# Altium PCB BatteryNode.PcbDoc
Units mm, origin at the board's own origin, x right, y up, seen from the top; angles counter-clockwise.
Board outline 31.5 x 42.42 mm, 2 copper layers (Top Layer, Bottom Layer); 13 components, 16 nets, 61 pads, 0 vias.
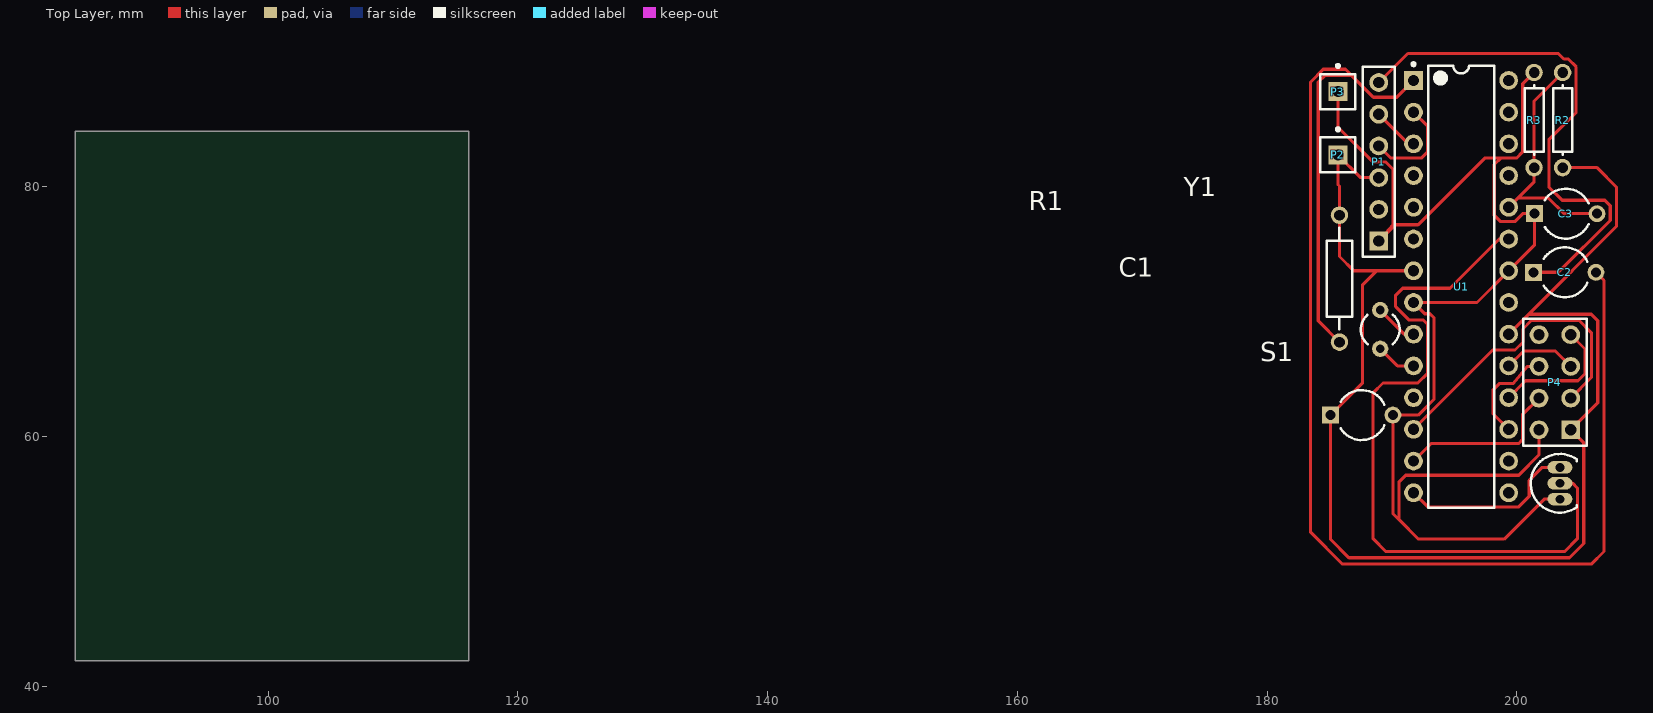
[diagram p0: Top Layer view]
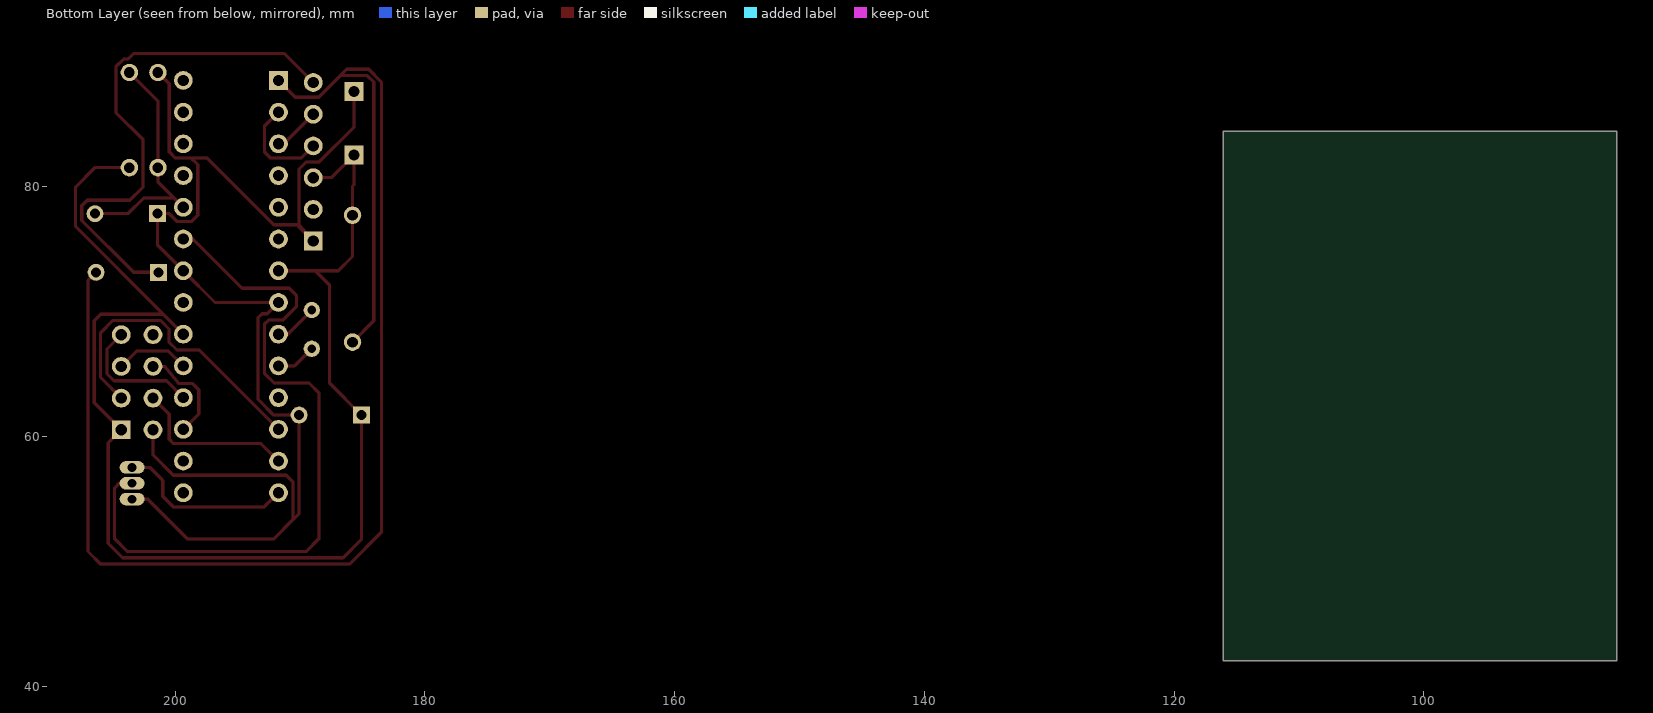
[diagram p1: Bottom Layer view, seen from below]

## Layer stack, top to bottom
Top Layer: signal copper 0.0356
Dielectric: dielectric 0.32, FR-4, Dk 4.8
Bottom Layer: signal copper 0.0356

## Board outline
84.582,84.455 116.078,84.455 116.078,42.418 116.078,42.037 84.582,42.037

## Design rules (kind name [scope] priority, off if disabled: settings)
Clearance [All] p1: gap=0.254
PolygonConnect [All] p1: connectstyle=Relief reliefconductorwidth=0.254 reliefentries=4 polygonreliefangle="90 Angle"
RoomDefinition BatteryNode [InComponentClass('BatteryNode')] p1: confinementstyle=ConfineIn formatcopy=TRUE lockcomponents=FALSE outline 179.284,49.784 209.677,49.784 209.677,96.139 179.284,96.139
RoutingLayers [All] p1: top layer_v5=TRUE bottom layer_v5=FALSE
RoutingVias [All] p1: holewidth=0.711 width=1.27 viastyle="Through Hole" minholewidth=0.711 minwidth=1.27 maxholewidth=0.711 maxwidth=1.27
SilkscreenOverComponentPads [All] p1: minsilkscreentomaskgap=0.254
SolderMaskExpansion [All] p1: expansion=0.102
Width [All] p1: maxlimit=0.254 minlimit=0.254 preferedwidth=0.254
26 further rules are at their usual default settings.

## Components (designator, comment, footprint, x,y, rotation, side; value= is the part's Value field where it differs from the comment)
C1 "Cap2" CAPR5-4X5 187.579,61.722 r0 top
C2 "Cap2" CAPR5-4X5 203.835,73.152 r0 top
C3 "Cap2" CAPR5-4X5 203.922,77.851 r0 top
P1 "FTDI" HDR1X6 188.949,75.652 r90 top
P2 "+" PIN1 185.674,82.55 r0 top
P3 "-" PIN1 185.674,87.63 r0 top
P4 "nRF24L01Connector" HDR2X4 204.316,60.539 r90 top
R1 "Res2" AXIAL-0.4 185.801,72.644 r90 top
R2 "Res1" AXIAL-0.3 203.668,85.344 r90 top
R3 "Res1" AXIAL-0.3 201.382,85.344 r90 top
S1 "LM35" TO-92 203.454,56.261 r0 top
U1 "ATmega328-PU" 28P3 195.54,72.009 r0 top
Y1 "XTAL" R38 189.063,68.58 r0 top

## Footprints (in the part's own frame and the unit in brackets; to place one, negate y for a bottom-side part, rotate by r counter-clockwise, add the part's x,y. Pads: shape width x height; smd on the part's side, far side on the other; paste and mask are expansions set on the pad)
28P3 [mm] "DIP, 28-Leads, Row Spacing 7.62mm, Pitch 2.54mm, Body 34.67x7.3mm"
  rect 1.5x1.5 hole 0.9: 1(-3.81,16.51)
  round 1.5 hole 0.9: 2(-3.81,13.97) 3(-3.81,11.43) 4(-3.81,8.89) 5(-3.81,6.35) 6(-3.81,3.81) 7(-3.81,1.27) 8(-3.81,-1.27) 9(-3.81,-3.81) 10(-3.81,-6.35) 11(-3.81,-8.89) 12(-3.81,-11.43) 13(-3.81,-13.97) 14(-3.81,-16.51) 15(3.81,-16.51) 16(3.81,-13.97) 17(3.81,-11.43) 18(3.81,-8.89) 19(3.81,-6.35) 20(3.81,-3.81) 21(3.81,-1.27) 22(3.81,1.27) 23(3.81,3.81) 24(3.81,6.35) 25(3.81,8.89) 26(3.81,11.43) 27(3.81,13.97) 28(3.81,16.51)
  silkscreen extent -3.93,-17.7 2.65,17.93, body extent -3.6,-17.65 3.6,17.65, height 4.58
AXIAL-0.3 [mm] "Axial Device, Thru-Hole; 2 Leads; 0.3 in Pin Spacing"
  round 1.4 hole 0.85: 1(-3.81,0) 2(3.81,0)
  silkscreen extent -2.77,-0.76 2.77,0.76
AXIAL-0.4 [mm] "Axial Device, Thru-Hole; 2 Leads; 0.4 in Pin Spacing"
  round 1.4 hole 0.85: 1(-5.08,0) 2(5.08,0)
  silkscreen extent -4.06,-1.02 4.06,1.02
CAPR5-4X5 [mm] "Capacitor; 2 Leads"
  rect 1.35x1.35 hole 0.8: 1(-2.5,0)
  round 1.35 hole 0.8: 2(2.5,0)
  silkscreen extent -1.69,-2 1.82,2
HDR1X6 [mm] "Connector; Header; 6 Position"
  rect 1.5x1.5 hole 0.9: 1(0,0)
  round 1.5 hole 0.9: 2(2.54,0) 3(5.08,0) 4(7.62,0) 5(10.16,0) 6(12.7,0)
  silkscreen extent -1.27,-1.27 13.97,1.27
HDR2X4 [mm] "Connector; Header; 4x2 Position"
  rect 1.5x1.5 hole 0.9: 1(0,0)
  round 1.5 hole 0.9: 2(0,2.54) 3(2.54,0) 4(2.54,2.54) 5(5.08,0) 6(5.08,2.54) 7(7.62,0) 8(7.62,2.54)
  silkscreen extent -1.27,-1.27 8.89,3.81
PIN1 [mm] "Connector; Plug"
  rect 1.5x1.5 hole 0.9: 1(0,0)
  silkscreen extent -1.4,-1.4 1.4,2.17
R38 [mm] "Crystal, Thru-Hole; 2 Leads; Body 3.1 x 8.2 mm (Dia.xH)"
  round 1.3 hole 0.7: 1(0,1.55) 2(0,-1.55)
  silkscreen extent -1.55,-1.19 1.55,1.17
TO-92 [mm] "TO, Flat Index; 3 In-Line, Axial Leads; Body Dia. 4.6mm; Leads 0.41 x 0.39 mm (max)"
  oval 2x1 hole 0.7: 1(0,1.27) 2(0,0) 3(0,-1.27)
  silkscreen extent -2.34,-2.34 1.35,2.34

## Part data
C1 C2 C3: "Capacitor"
P1: library part "Header 6", "Header, 6-Pin"
P2 P3: library part Plug, "Plug"
R1 R2 R3: "Resistor"
U1: "8-bit AVR Microcontroller, 32KB Flash, 1KB EEPROM, 2KB SRAM, 28-pin PDIP, Industrial Grade (-40°C to 85°C)"
Y1: "Crystal Oscillator"

## Nets (pads, with @x,y where several pads share a name; then routed paths per layer and width w, separated by ;. In a path a pad name is that pad's centre, name@x,y a point inside that pad or via, vN(x,y) a via of type N, cw(c..) or ccw(c..) an arc to the next point about the centre after c; other vN are vias at no path point)
GND: C1.2 C3.1 P1.1 P3.1 P4.2 R3.2 S1.3 U1.8 U1.22 | length 111.8
  Top Layer w0.254: P3.1 185.674,84.785 188.468,81.991 189.484,81.991 190.091,81.384 190.091,76.962 ; R3.2 200.482,88.254 200.482,82.804 199.974,82.296 198.704,82.296 ; P4.2 201.776,58.532 200.152,56.908 191.096,56.908 190.576,56.388 190.576,53.34 ; S1.3 202.184,54.991 198.981,51.788 192.128,51.788 190.576,53.34 ; 190.091,76.962 190.091,76.794 P1.1 190.091,76.962 ; 190.091,76.962 192.1,76.962 197.434,82.296 198.704,82.296 ; 190.576,53.34 190.079,53.837 C1.2 192.1,61.722 193.369,62.991 193.369,69.509 193.04,69.838 192.631,69.838 U1.8 196.81,70.739 U1.22 201.422,75.351 C3.1 200.482,77.851 199.847,77.216 198.704,77.216 198.196,77.724 198.196,81.788 198.704,82.296
NetC2_1: C2.1 P1.6 | length 42.3
  Top Layer w0.254: P1.6 191.275,90.678 203.327,90.678 203.77,90.235 204.116,90.235 204.749,89.601 204.749,85.954 202.565,83.769 202.565,79.985 203.632,78.918 207.046,78.918 207.478,78.486 207.478,77.303 203.327,73.152 C2.1
NetC2_2: C2.2 R1.1 U1.1 | length 118.2
  Top Layer w0.254: R1.1 184.099,69.266 184.099,88.392 184.607,88.9 186.792,88.9 ; U1.1 190.384,87.173 188.519,87.173 186.792,88.9 ; C2.2 206.985,72.502 206.985,50.8 205.969,49.784 186.042,49.784 183.49,52.337 183.49,88.392 184.506,89.408 186.284,89.408 186.792,88.9
NetC3_2: C3.2 R2.2 R3.1 U1.24 | length 19.4
  Top Layer w0.254: U1.24 200.087,79.096 ; R2.2 201.382,86.868 R3.1 201.382,80.391 200.087,79.096 ; C3.2 203.784,77.851 202.54,79.096 200.087,79.096
NetP1_4: P1.4 U1.2 | length 8.2
  Top Layer w0.254: P1.4 189.925,82.296 192.353,82.296 192.861,82.804 192.861,84.848 U1.2
NetP1_5: P1.5 U1.3 | length 3.8
  Top Layer w0.254: P1.5 191.322,83.439 U1.3
NetP4_3: P4.3 U1.12 | length 24.8
  Top Layer w0.254: U1.12 198.08,66.929 199.859,66.929 200.494,67.564 200.494,68.617 201.168,69.29 204.991,69.29 205.969,68.312 205.969,64.732 P4.3
NetP4_4: P4.4 U1.13 | length 13.3
  Top Layer w0.254: U1.13 193.139,59.448 200.152,59.448 200.481,59.777 200.481,61.784 P4.4
NetP4_5: P4.5 U1.19 | length 6
  Top Layer w0.254: U1.19 200.544,66.853 203.083,66.853 P4.5
NetP4_6: P4.6 U1.17 | length 8.2
  Top Layer w0.254: U1.17 198.12,61.809 198.12,63.754 198.628,64.262 199.72,64.262 200.824,65.619 P4.6
NetP4_7: P4.7 U1.18 | length 10.5
  Top Layer w0.254: U1.18 200.696,64.465 204.902,64.465 205.461,65.024 205.461,67.015 P4.7
NetS1_1: S1.1 U1.14 | length 14.3
  Top Layer w0.254: U1.14 192.861,54.368 200.152,54.368 200.992,55.208 200.992,56.491 202.032,57.531 S1.1
NetS1_2: S1.2 U1.23 | length 58.4
  Top Layer w0.254: U1.23 198.588,75.819 194.651,71.882 190.856,71.882 190.297,71.323 190.297,70.409 191.376,69.33 192.532,69.33 192.861,69.001 192.861,65.074 192.075,64.287 189.281,64.287 188.493,63.5 188.493,51.816 189.509,50.8 203.835,50.8 204.851,51.816 204.851,55.88 204.47,56.261 S1.2
NetU1_9: U1.9 Y1.1 | length 3.5
  Top Layer w0.254: Y1.1 190.994,68.199 U1.9
NetU1_10: U1.10 Y1.2 | length 3.2
  Top Layer w0.254: Y1.2 190.434,65.659 U1.10
VCC: C1.1 P1.3 P2.1 P4.1 R1.2 R2.1 U1.7 U1.20 | length 108.3
  Top Layer w0.254: P1.3 187.492,80.732 P2.1 185.674,80.188 185.801,80.061 R1.2 185.801,74.422 186.944,73.279 188.773,73.279 ; U1.7 188.773,73.279 ; U1.20 200.949,69.798 ; R2.1 206.432,81.534 207.986,79.98 207.986,76.835 200.949,69.798 ; 188.773,73.279 187.655,72.161 187.655,64.298 C1.1 185.079,51.763 186.55,50.292 204.216,50.292 205.359,51.435 205.359,59.496 P4.1 206.477,62.7 206.477,69.277 205.955,69.798 200.949,69.798
pads on no net: P1.2 P4.8 U1.4 U1.5 U1.6 U1.11 U1.15 U1.16 U1.21 U1.25 U1.26 U1.27 U1.28